# Altium PCB MB1814.PcbDoc (part 2 of 6)
Units mm, origin at the board's own origin, x right, y up, seen from the top; angles counter-clockwise.
Board outline 70 x 82.5 mm, 4 copper layers (Top Layer, Signal Layer 1, Signal Layer 2, Bottom Layer), stack 1.614 mm thick; 212 components, 160 nets, 914 pads, 715 vias.
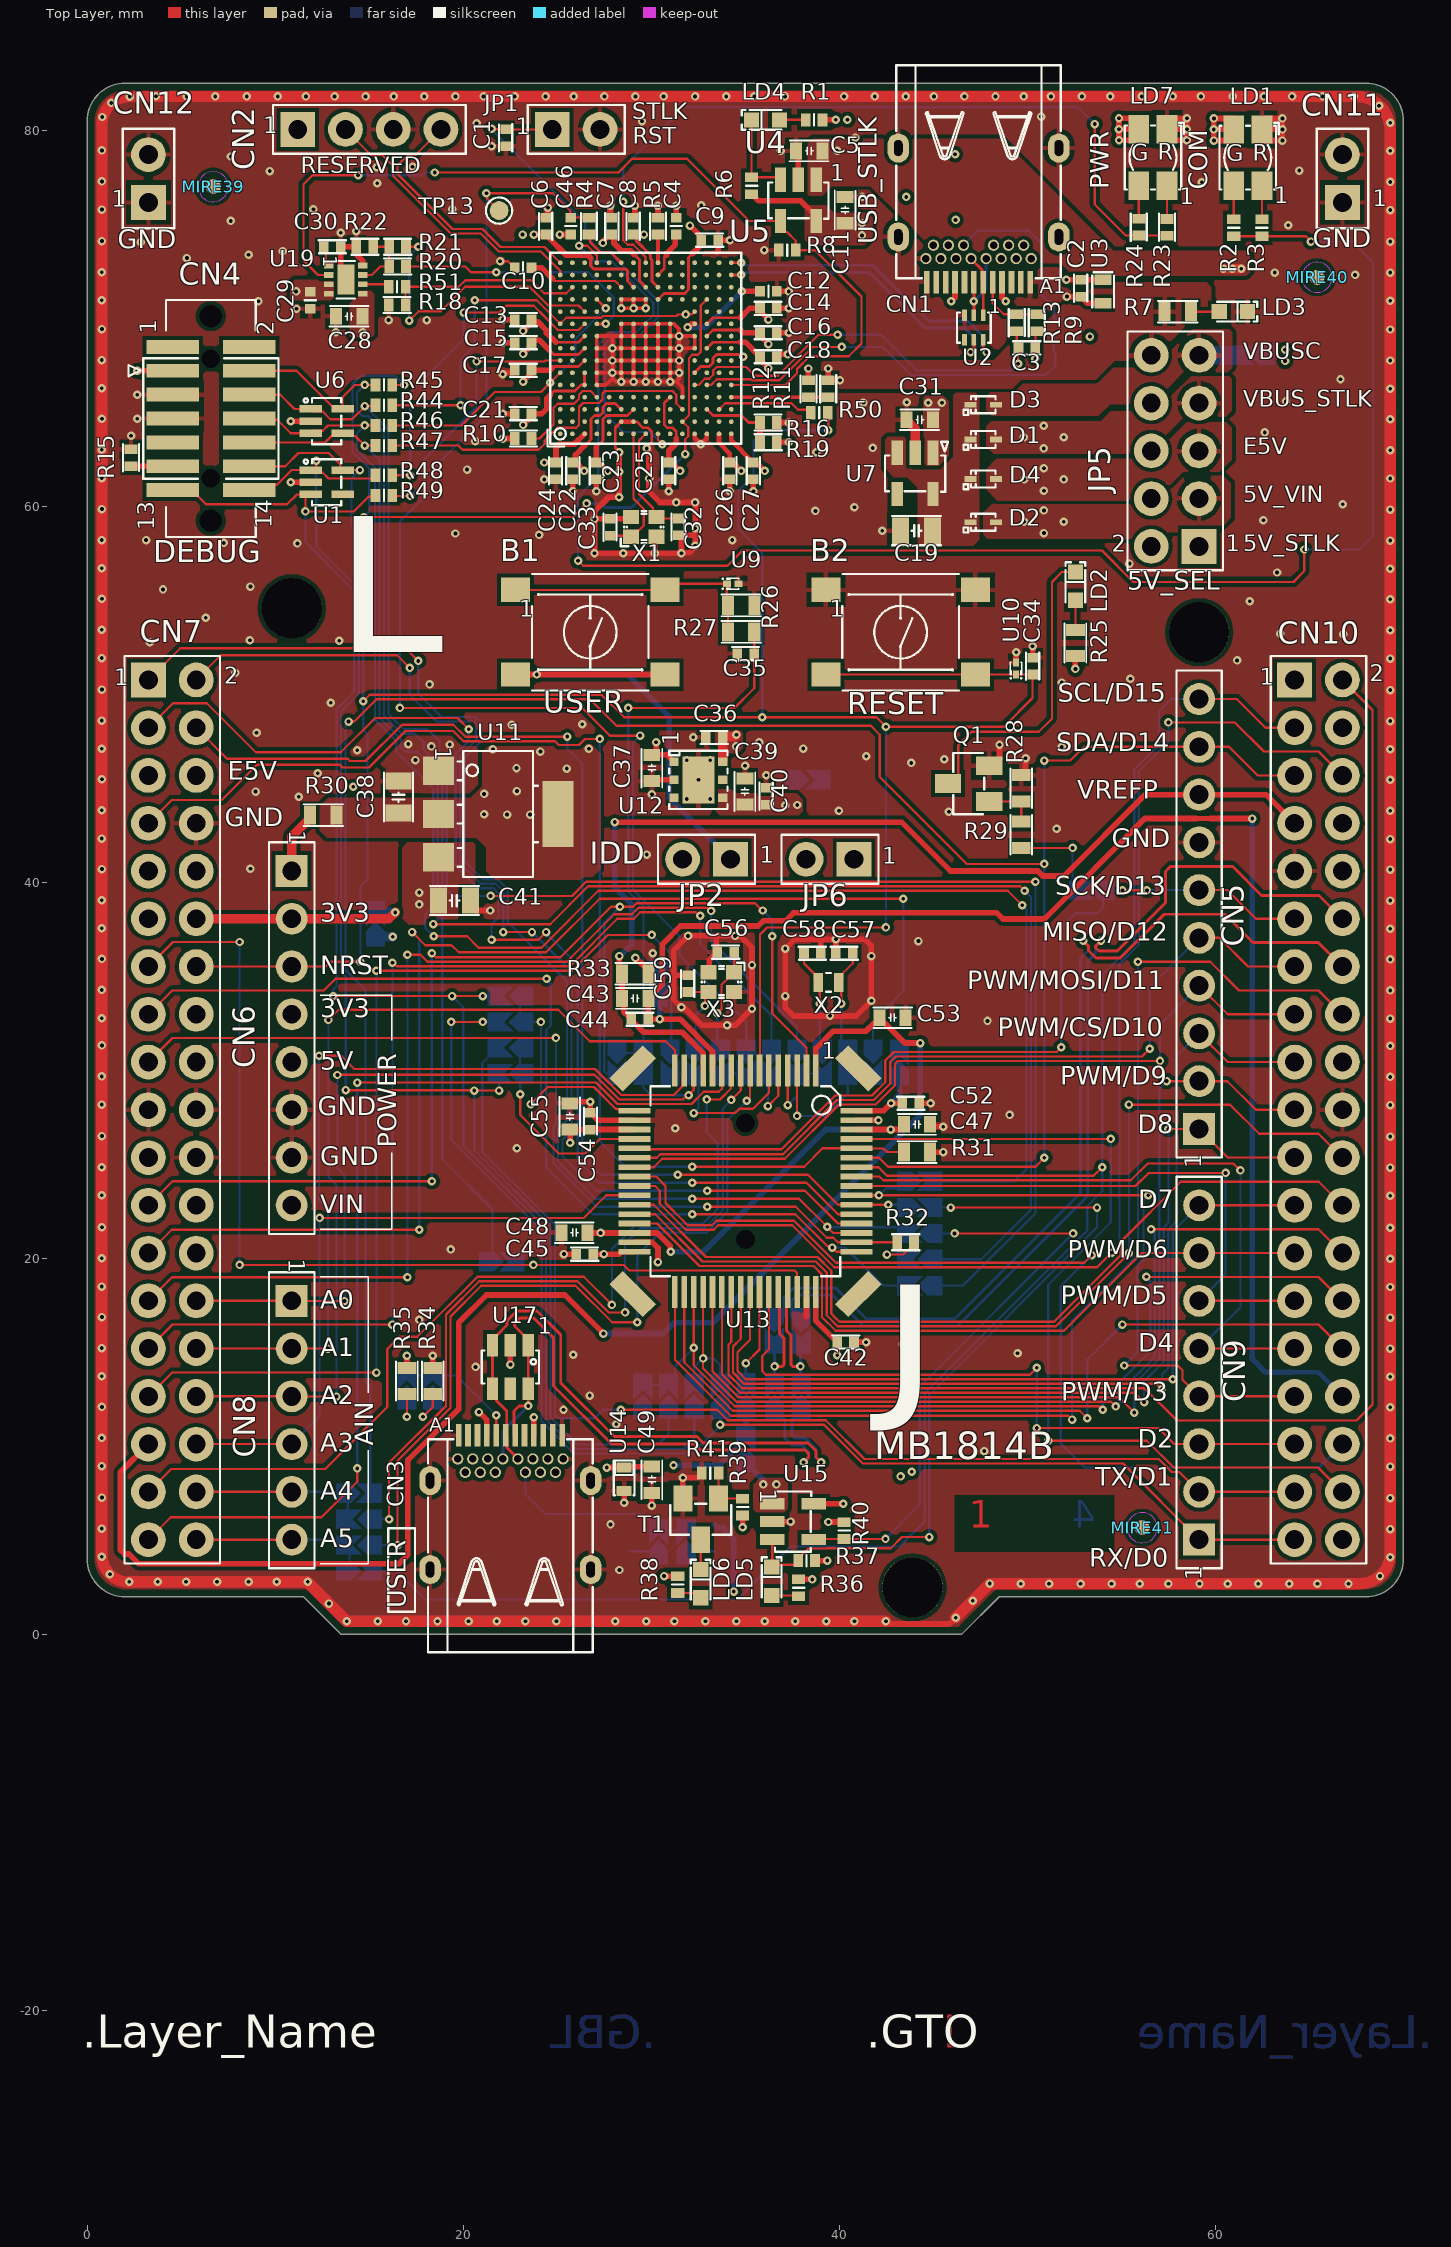
[diagram p0: Top Layer view]

## Part data (continued)
LD2 LD3 LD6: library part MCD-00588, "LED Green, 0603 SMD, Forward Voltage Typ=2V, Max=2.5V", Alternate_Manufacturer="VISHAY SEMICONDUCTOR OPTO DIVISION", Alternate_Manufacturer_Part_Number=VLMTG1300-GS08, Manufacturer="OSRAM OPTO SEMICONDUCTORS", Manufacturer_Part_Number="LG Q396-PS-35", Package="LED 0603", ComponentLink1Description=Datasheet, ComponentLink1URL="http://tunmcdsvn.tun.st.com/Component_Datasheet_Library/Trunk/Display/OSRAM_LED_GREEN_LG Q396-PS-35", ECCN_EU=n/a, ECCN_US=n/a, Internal_Part_Number=MCD-00588, Order_Code_Digikey="LG Q396-PS-35-ND", Part_Type=Display, Provided_By=SUBCO, Status=Released